# EAGLE board layout 1.0 (EAGLE 5.06)
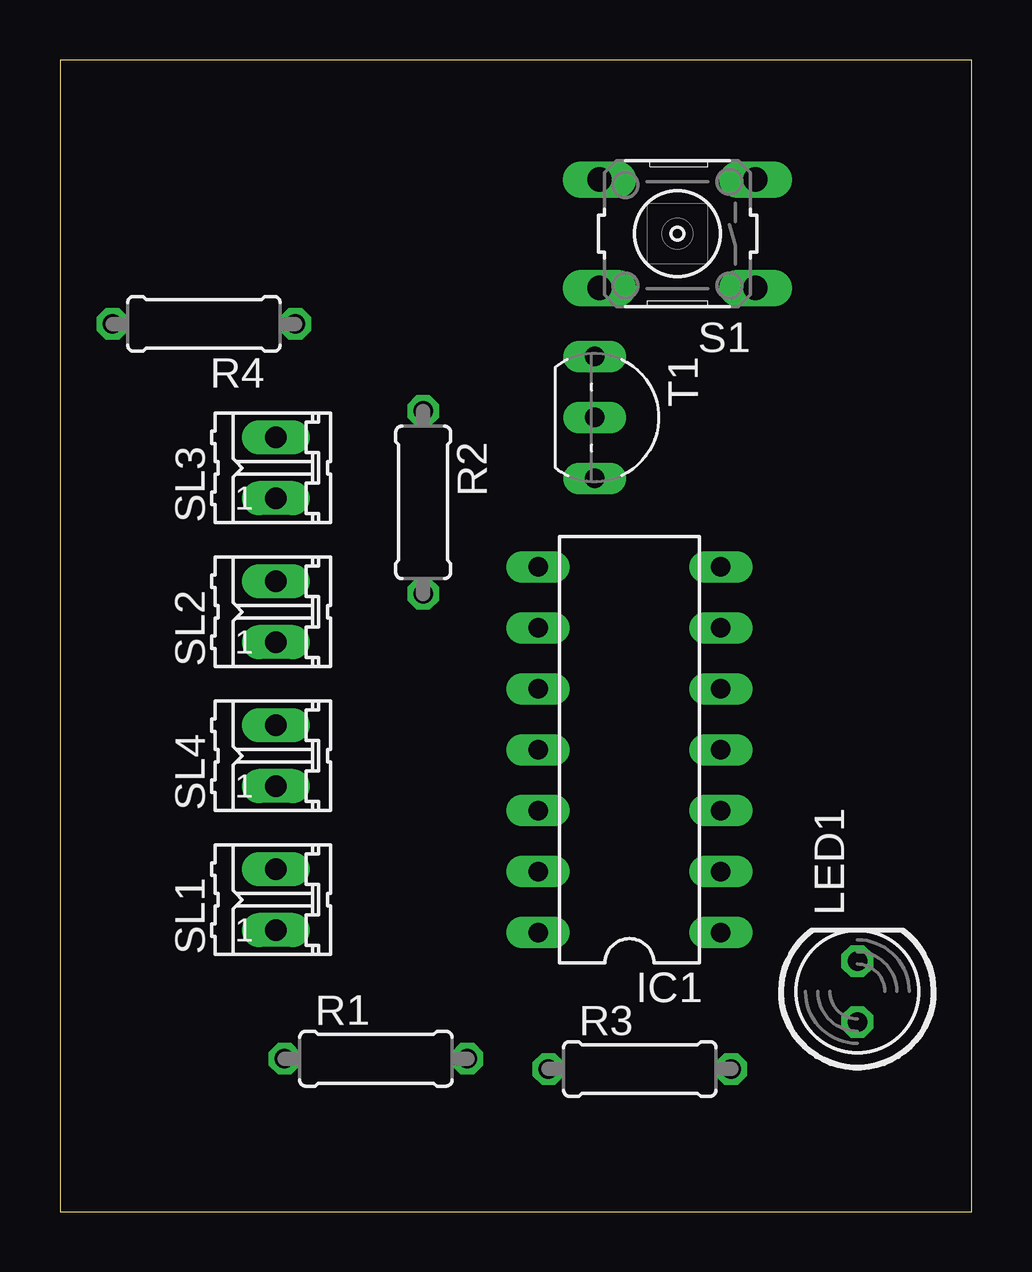
[diagram p0: board, top side]
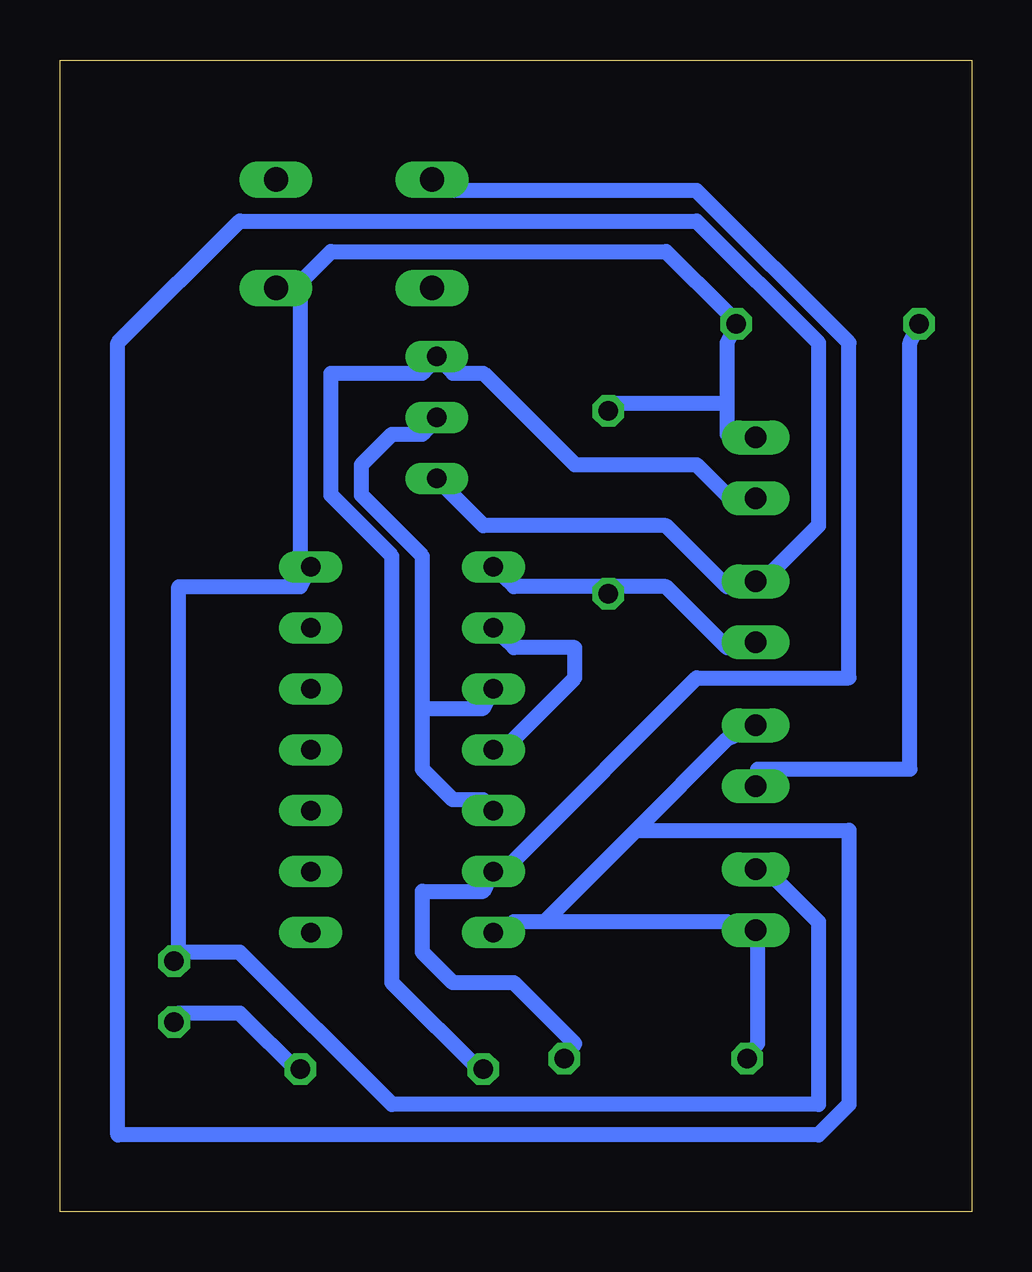
[diagram p1: board, bottom side, seen from below]

Size 38 x 48 mm. Coordinates in mm from the lower left corner, seen from the top.
Outline: 0,0 38,0 38,48 0,48 0,0
Copper layers (1*16): Top 0.035mm / dielectric 1.5mm / Bottom 0.035mm
Design rules "default *": minimum track width 25mil, minimum drill 24mil, track to track 8mil, track to pad 8mil, pad to pad 8mil, via to via 8mil, smd to smd 8mil, copper to edge 40mil, drill to drill 8mil, minimum pad ring 10mil, minimum via ring 8mil, stop-mask expansion 4mil, vias tented up to drill 0mil, thermal gap 10mil

## Footprints (pad centres in the part's own frame; a part is rotated, then mirrored left to right if it is on the bottom)
DIL14 = drill 0.813 long: 1 -7.62,-3.81; 2 -5.08,-3.81; 3 -2.54,-3.81; 4 0,-3.81; 5 2.54,-3.81; 6 5.08,-3.81; 7 7.62,-3.81; 8 7.62,3.81; 9 5.08,3.81; 10 2.54,3.81; 11 0,3.81; 12 -2.54,3.81; 13 -5.08,3.81; 14 -7.62,3.81
LED5MM = drill 0.813 octagon: A -1.27,0; K 1.27,0
0207/7 = drill 0.813 octagon: 1 -3.81,0; 2 3.81,0
B3F-10XX = drill 1.016 long: 1 -3.251,2.261; 2 3.251,2.261; 3 -3.251,-2.261; 4 3.251,-2.261
02P = drill 0.914 long: 1 -1.27,0; 2 1.27,0
TO92-EBC = drill 0.813 long: B 0,-1.27; C 2.54,-1.27; E -2.54,-1.27

## Placement (x,y rotation side)
IC1  4011N  [DIL14]  23.74,19.25 90 top
LED1  1,5V  [LED5MM]  33.24,9.17 90 top
R1  10k  [0207/7]  13.17,6.37 0 top
R2  10k  [0207/7]  15.14,29.56 270 top
R3  270  [0207/7]  24.17,5.94 0 top
R4  150  [0207/7]  6,37 180 top
S1  SWITCH  [B3F-10XX]  25.74,40.76 180 top
SL1  [02P]  9,13 90 top
SL2  [02P]  9,25 90 top
SL3  [02P]  9,31 90 top
SL4  [02P]  9,19 90 top
T1  548  [TO92-EBC]  23.56,33.1 270 top

## Library data of the parts
IC1 = 40xx
LED1 = led
R1-R4 = rcl
S1 = switch-omron
SL1-SL4 = con-amp-quick
T1 = transistor

## Nets
GND: IC1.7 LED1.K R2.1 R4.1 S1.1 SL1.2 SL3.2
N$1: IC1.9 IC1.11
N$2: IC1.10 IC1.12 T1.B
N$3: IC1.13 R1.2 S1.4
N$4: R4.2 SL4.1
N$5: IC1.8 R2.2 SL2.1
N$6: R3.1 SL3.1 T1.E
N$7: LED1.A R3.2
VCC: IC1.14 R1.1 SL1.1 SL2.2 SL4.2 T1.C

## Tracks (layer width: path | path; a pad name or v marks a point on that pad's centre or on a via)
GND
  Bottom 0.635: 10.19,33.67 10.19,32.4 SL3.2 | 10.19,33.67 10.19,36.21 R4.1 10.19,37.48 12.73,40.02 26.7,40.02 27.97,38.75 | 10.19,33.67 15.27,33.67 R2.1 | 27.97,38.75 27.97,27.32 IC1.7 27.97,26.05 33.05,26.05 33.05,10.81 | 33.05,10.81 30.51,10.81 24.16,4.46 6.38,4.46 6.38,12.08 8.92,14.62 SL1.2 | 33.05,10.81 LED1.K | 27.97,38.75 S1.1
N$1
  Bottom 0.635: IC1.11 19.08,19.7 16.54,22.24 16.54,23.51 19.08,23.51 IC1.9
N$2
  Bottom 0.635: 22.89,20.97 22.89,18.43 21.62,17.16 20.35,17.16 IC1.12 | 22.89,20.97 20.35,20.97 IC1.10 | 22.89,20.97 22.89,27.32 25.43,29.86 25.43,31.13 24.16,32.4 22.89,32.4 T1.B
N$3
  Bottom 0.635: R1.2 16.54,7 19.08,9.54 21.62,9.54 22.89,10.81 22.89,13.35 20.35,13.35 IC1.13 19.08,14.62 11.46,22.24 5.11,22.24 5.11,36.21 11.46,42.56 21.62,42.56 S1.4
N$4
  Bottom 0.635: R4.2 2.57,36.21 2.57,18.43 8.92,18.43 SL4.1
N$5
  Bottom 0.635: 15.27,26.05 19.08,26.05 IC1.8 | 15.27,26.05 12.73,26.05 10.19,23.51 SL2.1 | 15.27,26.05 R2.2
N$6
  Bottom 0.635: R3.1 20.35,5.73 24.16,9.54 24.16,27.32 26.7,29.86 26.7,34.94 22.89,34.94 T1.E 21.62,34.94 20.35,34.94 16.54,31.13 11.46,31.13 10.19,29.86 SL3.1
N$7
  Bottom 0.635: R3.2 27.97,5.73 30.51,8.27 33.05,8.27 LED1.A
VCC
  Bottom 0.635: T1.C 21.62,29.86 20.35,28.59 12.73,28.59 10.19,26.05 SL2.2 8.92,26.05 6.38,28.59 6.38,36.21 11.46,41.29 30.51,41.29 35.59,36.21 35.59,3.19 6.38,3.19 5.11,4.46 5.11,15.89 14,15.89 | R1.1 8.92,7 8.92,12.08 SL1.1 10.19,12.08 17.81,12.08 | 17.81,12.08 19.08,12.08 IC1.14 | 17.81,12.08 14,15.89 | 14,15.89 10.19,19.7 SL4.2